# Altium PCB main.PcbDoc
Units mm, origin at the board's own origin, x right, y up, seen from the top; angles counter-clockwise.
Board outline 55.36 x 48.37 mm, 2 copper layers (Top Layer, Bottom Layer); 17 components, 15 nets, 86 pads, 15 vias.
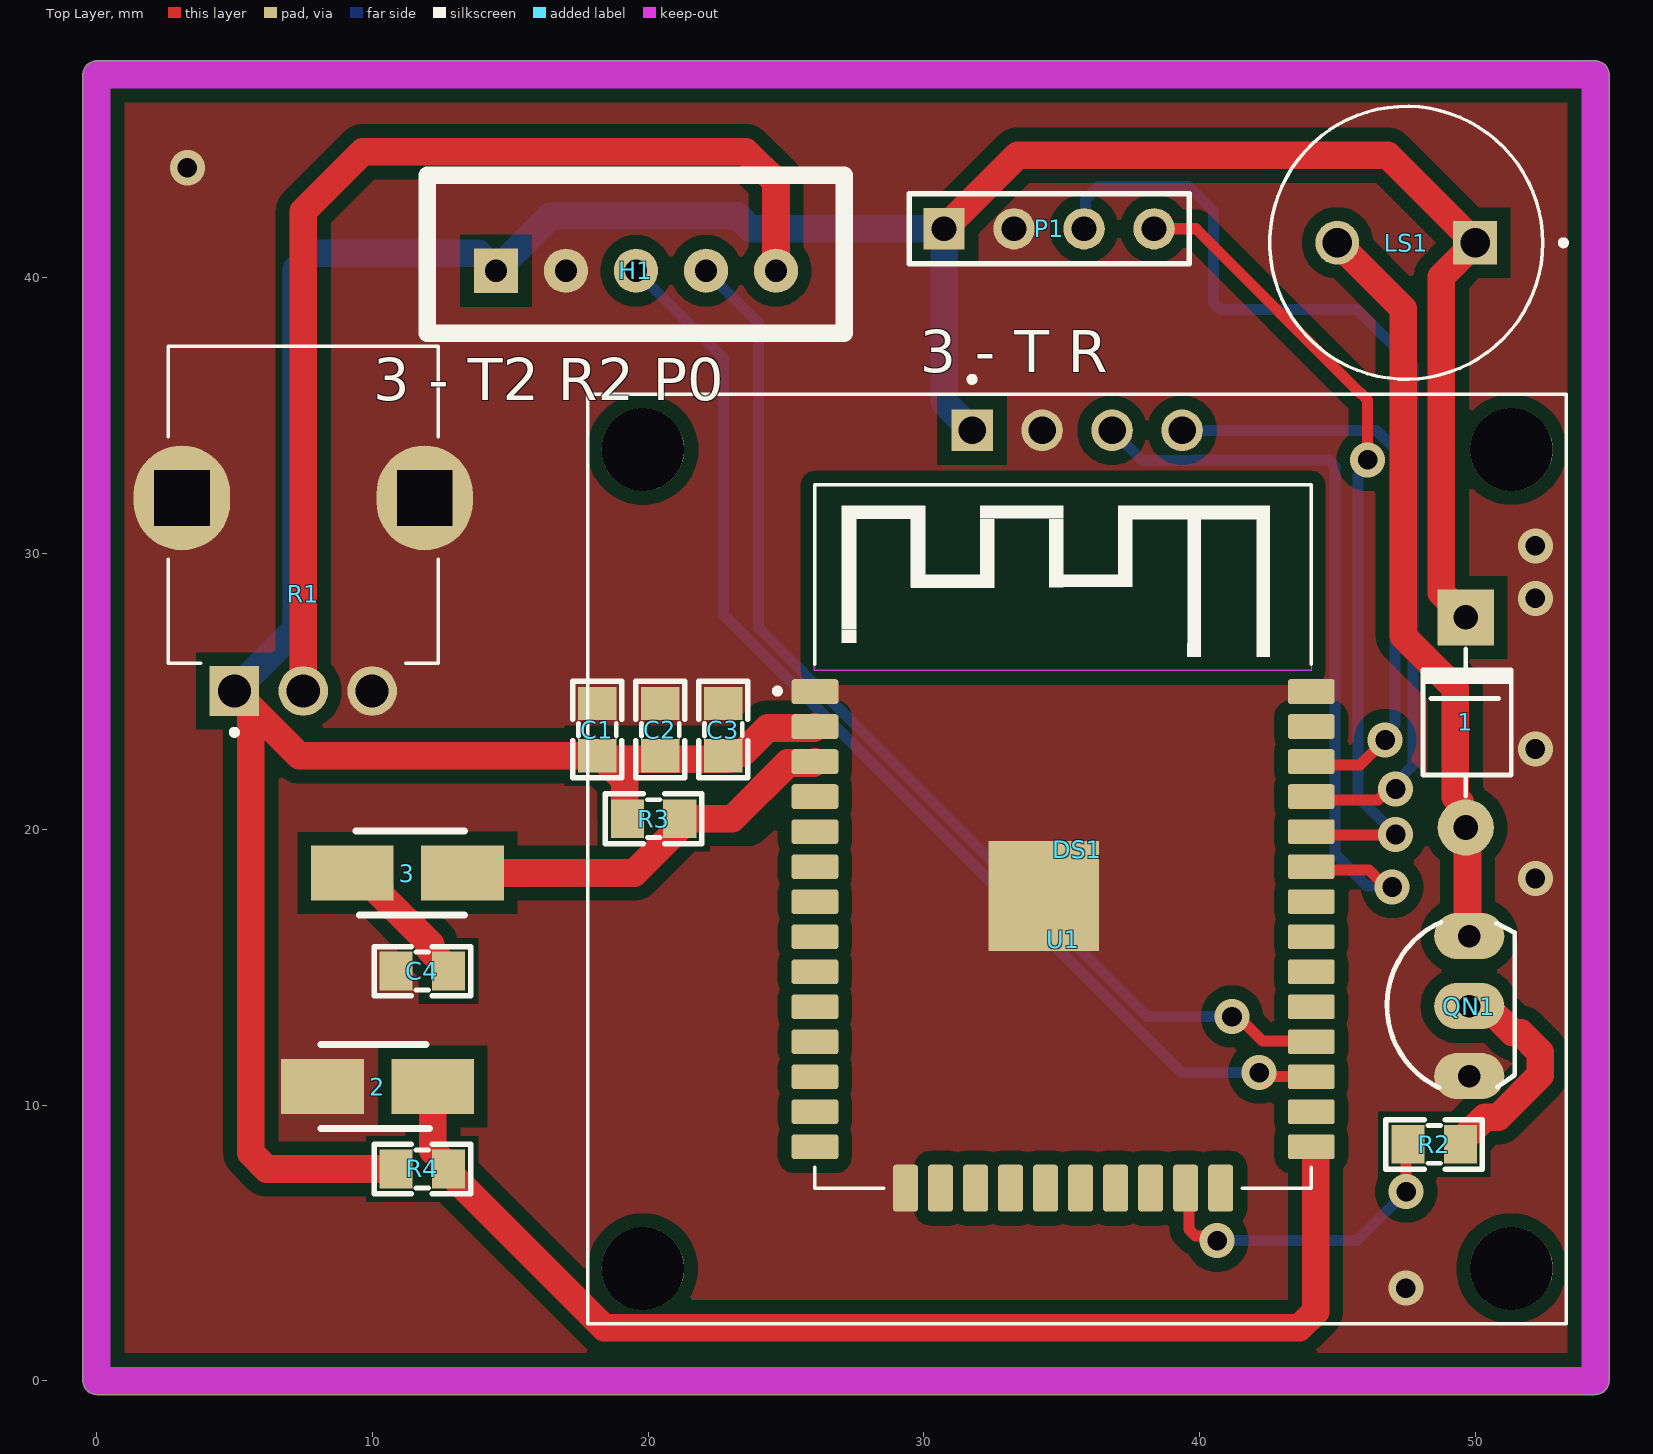
[diagram p0: Top Layer view]
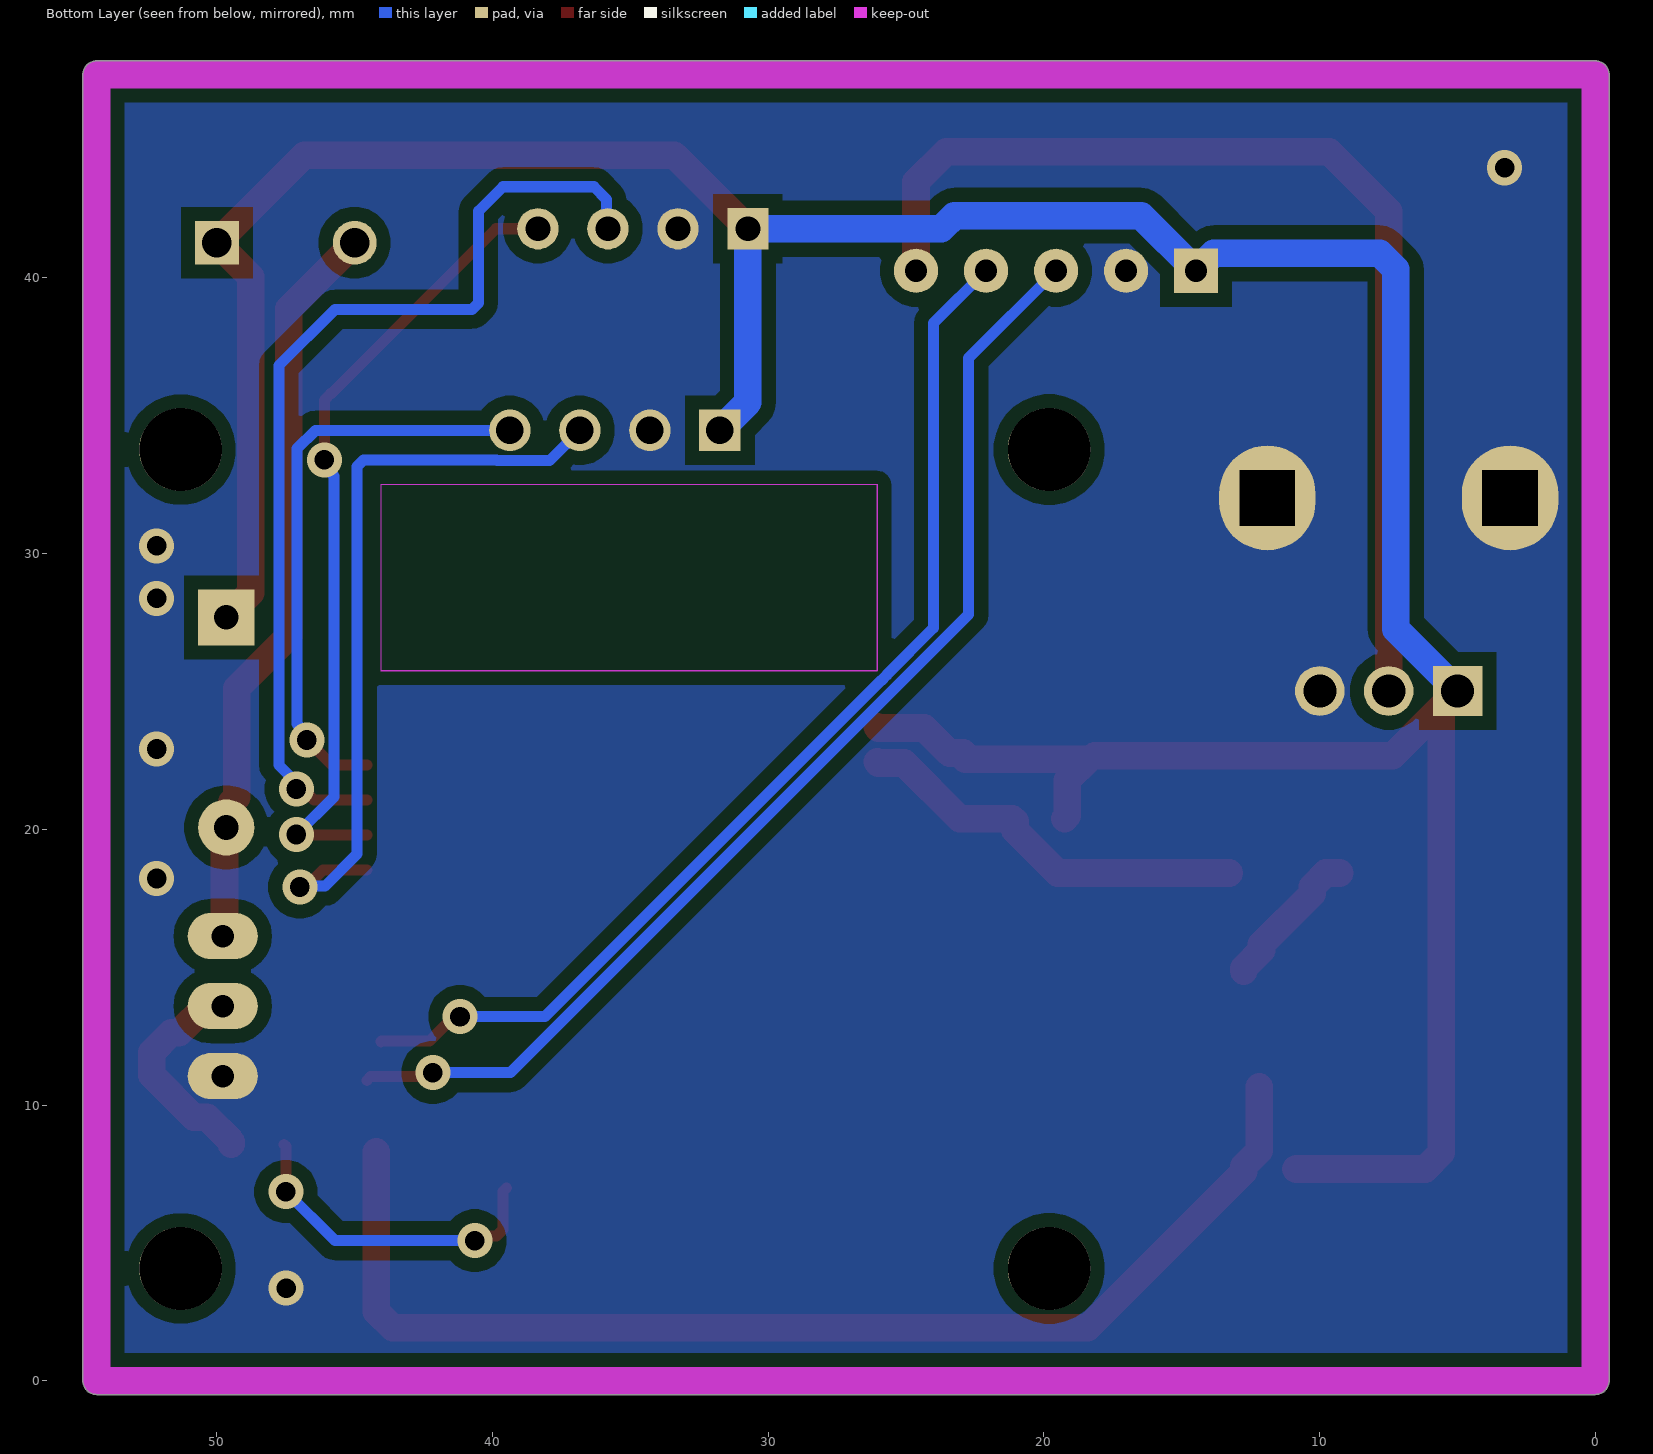
[diagram p1: Bottom Layer view, seen from below]
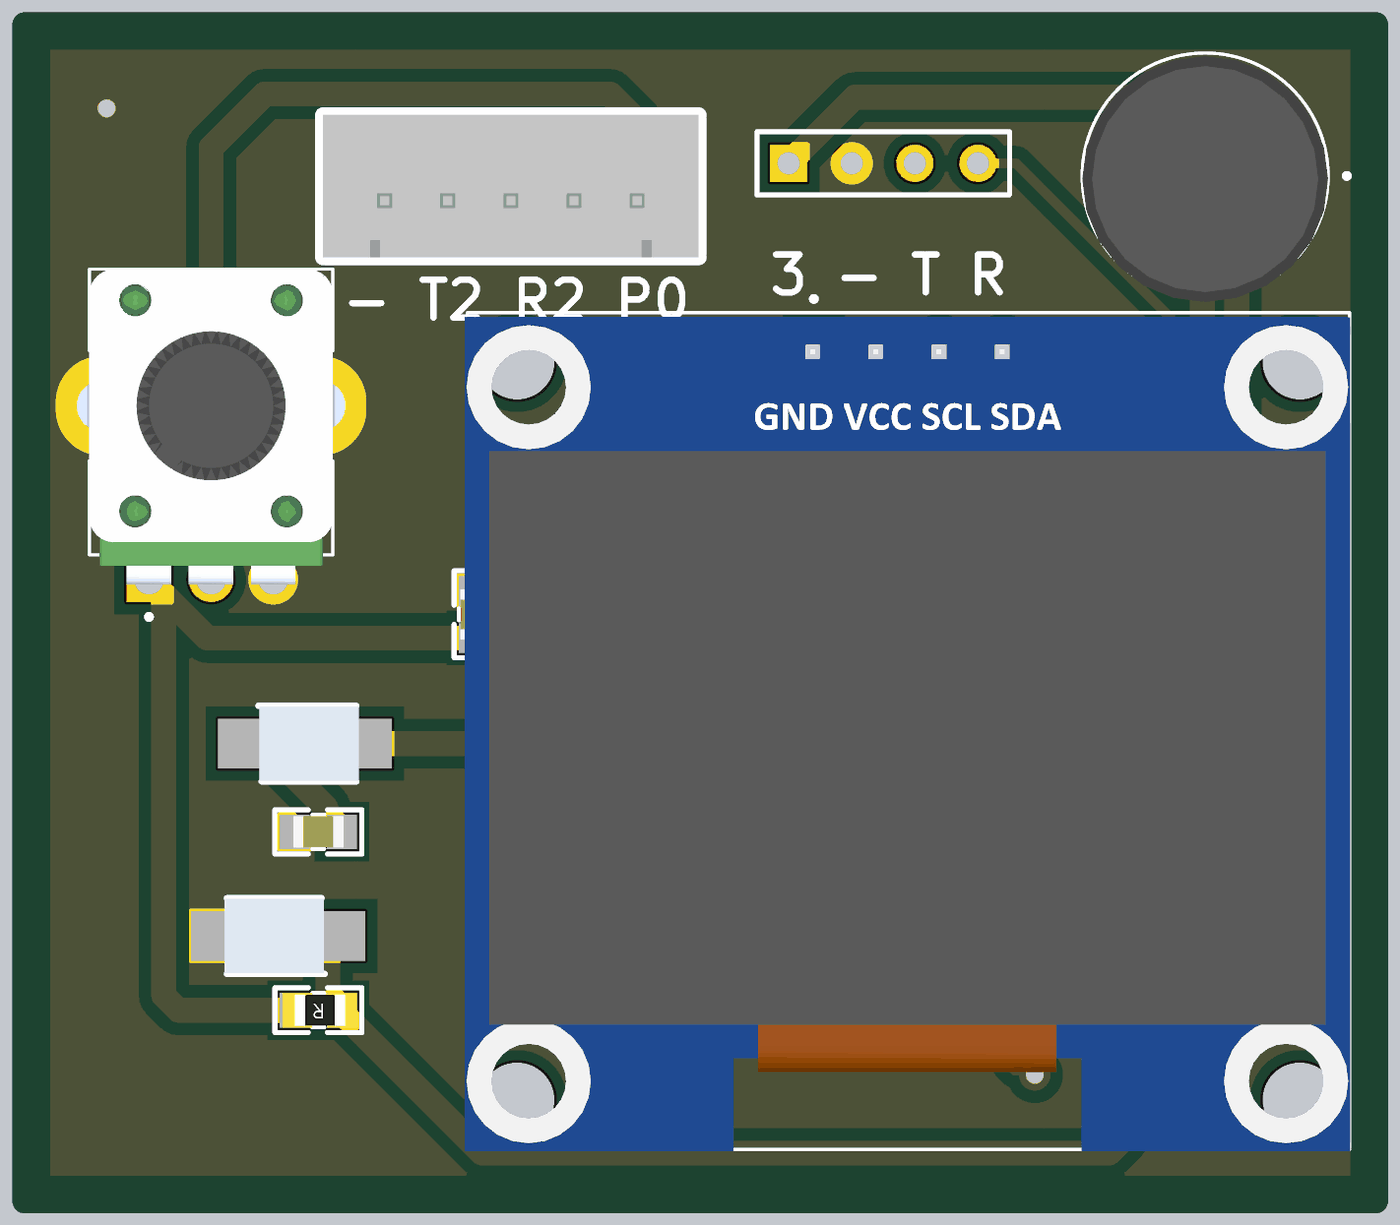
[diagram p2: 3D render of the assembled board from above, using the file's embedded part models]

## Layer stack, top to bottom
Top Solder: solder mask 0.0102, Solder Resist, Dk 3.5
Top Layer: signal copper 0.0356
Dielectric 1: dielectric 0.32, FR-4, Dk 4.8
Bottom Layer: signal copper 0.0356
Bottom Solder: solder mask 0.0102, Solder Resist, Dk 3.5

## Board outline
-0.5,0 ccw(c0,0) 0,-0.5 54.356,-0.5 ccw(c54.356,0) 54.856,0 54.856,47.371 ccw(c54.356,47.371) 54.356,47.871 0,47.871 ccw(c0,47.371) -0.5,47.371

## Design rules (kind name [scope] priority, off if disabled: settings)
Clearance [All] p1: gap=0.15 ignorepadtopadclearanceinfootprint=FALSE
PolygonConnect [All] p1: connectstyle=Direct reliefconductorwidth=0.254 reliefentries=4 polygonreliefangle="90 Angle" airgapwidth=0.254
RoutingVias [All] p1: holewidth=0.711 width=1.27 viastyle="Through Hole" minholewidth=0.711 minwidth=1.27 maxholewidth=0.711 maxwidth=1.27
SolderMaskExpansion [All] p1: expansion=0.102 istentingtop=FALSE
Width [All] p1: maxlimit=3 minlimit=0.15 preferedwidth=1 bottomlayer_prefwidth=0.254 minimp=50.000000 maximp=50.000000 favimp=50.000000
30 further rules are at their usual default settings.

## Components (designator, comment, footprint, x,y, rotation, side; value= is the part's Value field where it differs from the comment)
1 "100v" "DIODE 1A" 49.657,18.796 r270 top
2 "switch2" SWITCH 12.192,10.668 r180 top
3 "switch2" SWITCH 9.271,18.415 r0 top
C1 "22U" "tu 0805" 18.161,23.622 r270 top
C2 "104" "tu 0805" 20.447,23.622 r270 top
C3 "104" "tu 0805" 22.733,23.622 r270 top
C4 "104" "tu 0805" 11.811,14.859 r180 top
DS1 "OLED_128X64_1.3_I2C" "LCD_OLED_128X64_1.3_I2C - DUPLICATE" 35.56,18.923 r0 top
H1 "Header 5P 2.54 Duc Thang" XH2.54M-5 14.478,40.259 r0 top
LS1 "MA300D1-1" BUZZER 47.625,41.529 r270 top
P1 "TTL" HDR1X4 30.734,41.783 r0 top
QN1 "Trans 2N2222" TO92 49.784,13.589 r90 top value=C9014
R1 "RV09AF-40-20K-A10K" TRIM_RV09AF-40-20K-A10K 7.493,32.019 r0 top
R2 "1k" "tro smd 0805" 48.514,8.636 r0 top
R3 "10k" "tro smd 0805" 20.193,20.447 r0 top
R4 "10k" "tro smd 0805" 11.811,7.62 r180 top
U1 "ESP-WROOM-32" MODULE_ESP-WROOM-32 35.052,16.74 r0 top

## Footprints (in the part's own frame and the unit in brackets; to place one, negate y for a bottom-side part, rotate by r counter-clockwise, add the part's x,y. Pads: shape width x height; smd on the part's side, far side on the other; paste and mask are expansions set on the pad)
BUZZER [mm]
  rect 1.59x1.59 hole 1.06: 1(0.254,2.373)
  round 1.59 hole 1.06: 2(0.254,-2.627)
  silkscreen extent -4.7,-5.07 5.2,5.67, body extent -4.57,-5.08 5.33,4.82, height 7.5
"DIODE 1A" [mil] "Diode 1A"
  round 80 hole 35: 1(-50,0)
  rect 80x80 hole 35: 2(-350,0)
  silkscreen extent -305,-61 -95,65, body extent -366,-61 -34,65, height 122
HDR1X4 [mm] "Connector; Header; 4 Position"
  rect 1.5x1.5 hole 0.9: 1(0,0)
  round 1.5 hole 0.9: 2(2.54,0) 3(5.08,0) 4(7.62,0)
  silkscreen extent -1.27,-1.27 8.89,1.27
"LCD_OLED_128X64_1.3_I2C - DUPLICATE" [mm]
  rect 1.508x1.508 / inner round 1.508 / far side rect 1.508x1.508 hole 1: 1(-3.81,15.55)
  round 1.508 hole 1: 2(-1.27,15.55) 3(1.27,15.55) 4(3.81,15.55)
  round 3 hole 3 unplated: ""(-15.75,-14.85) ""(-15.75,14.85) ""(15.75,-14.85) ""(15.75,14.85)
  silkscreen extent -17.75,-16.85 17.75,17.5, body extent -17.87,-16.93 17.78,16.67, height 10.8
MODULE_ESP-WROOM-32 [mm]
  rrect22% 1.7x0.9 smd: 1(-9,8.255) 2(-9,6.985) 3(-9,5.715) 4(-9,4.445) 5(-9,3.175) 6(-9,1.905) 7(-9,0.635) 8(-9,-0.635) 9(-9,-1.905) 10(-9,-3.175) 11(-9,-4.445) 12(-9,-5.715) 13(-9,-6.985) 14(-9,-8.255) 25(9,-8.255) 26(9,-6.985) 27(9,-5.715) 28(9,-4.445) 29(9,-3.175) 30(9,-1.905) 31(9,-0.635) 32(9,0.635) 33(9,1.905) 34(9,3.175) 35(9,4.445) 36(9,5.715) 37(9,6.985) 38(9,8.255)
  rect 4x4 smd: 1.1(-0.7,0.845)
  rrect22% 0.9x1.7 smd: 15(-5.715,-9.755) 16(-4.445,-9.755) 17(-3.175,-9.755) 18(-1.905,-9.755) 19(-0.635,-9.755) 20(0.635,-9.755) 21(1.905,-9.755) 22(3.175,-9.755) 23(4.445,-9.755) 24(5.715,-9.755)
  Keep-Out Layer region: 9,9.026 -9.026,9.026 -9.026,15.75 9,15.75
  Keep-Out Layer region: 9,9.012 -9.012,9.012 -9.012,15.75 9,15.75
  silkscreen extent -10.46,-9.75 9,15.75, body extent -8.98,-9.78 9.02,15.72, height 3.25
SWITCH [mm]
  rect 3x2 smd: 1(0,0) 2(4,0)
  silkscreen extent 0.13,-1.52 4.06,1.52, body extent 0.16,-1.5 4.16,1.5, height 2.5
TO92 [mil] "TO-92"
  oval 66x100 hole 32: 1(-100,0) 2(0,0) 3(100,0)
  silkscreen extent -117,-65 120,118, body extent -109,-66 109,95, height 245
TRIM_RV09AF-40-20K-A10K [mm]
  rect 1.8x1.8 / inner round 1.8 / far side rect 1.8x1.8 hole 1.2: 1(-2.5,-7)
  round 1.8 hole 1.2: 2(0,-7) 3(2.5,-7)
  oval 3.5x3.8 hole 2 square: SH1(-4.4,0) SH2(4.4,0)
  silkscreen extent -4.9,-8.6 4.9,5.5, body extent -5.7,-7.2 5.7,5.5, height 20
"tro smd 0805" [mm]
  rect 1.2x1.4 smd: 1(-0.946,-0.061) 2(0.954,-0.061)
  silkscreen extent -1.75,-0.97 1.75,0.84, body extent -1.56,-0.76 1.44,0.64, height 0.53
"tu 0805" [mm] "Compoment SMD 80x50mil"
  rect 1.2x1.4 smd: 1(-0.946,-0.003) 2(0.954,-0.003)
  silkscreen extent -1.75,-0.89 1.75,0.89, body extent -1.01,-0.64 1.01,0.63, height 0.61
XH2.54M-5 [mm]
  rect 1.6x1.6 hole 0.8: 1(0,0)
  round 1.6 hole 0.8: 2(2.54,0) 3(5.08,0) 4(7.62,0) 5(10.16,0)
  silkscreen extent -2.48,-2.26 12.64,3.46, body extent -2.48,-2.26 12.64,3.48, height 6.91

## Part data
1: library part "Diode 1N4007", "Cắm", Chung_Loai=Cắm, Don_Vi=Con, Ma_Hang=MH001063, Ten_Linh_Kien="Diode 1N4007 1A (DIP)"
C1: library part "Tu 0805 225 25V 10%", "Dán", Chung_Loai=Dán, Don_Vi=Con, Ma_Hang=MH007483, So_Chan=2, Ten_Linh_Kien="Tụ 0805 225-2.2uF 25V 10%"
C2 C3 C4: library part "Tu 0805 104 50V 10%", "Dán", Chung_Loai=Dán, Don_Vi=Con, Ma_Hang=MH004551, So_Chan=2, Ten_Linh_Kien="Tụ 0805 104-100nF 10% 50V"
DS1: "Non-Touch Graphic LCD Display Module Transmissive White OLED, Monochrome I2C 1.3 (33.02mm) 128 x 64", Package=None, Check_prices=https://www.snapeda.com/parts/OLED%20128x64%201.3%22%20I2C/UNIVERSAL-SOLDER+Electronics+Ltd/view-part/?ref=eda, MF="UNIVERSAL-SOLDER Electronics Ltd", MP="OLED 128x64 1.3&quot; I2C", SnapEDA_Link=https://www.snapeda.com/parts/OLED%20128x64%201.3%22%20I2C/UNIVERSAL-SOLDER+Electronics+Ltd/view-part/?ref=snap
H1: "Cắm", Chung_Loai=Cắm, Don_Vi=Con, Ma_Hang=MH001298, Ten_Linh_Kien="Header 5P XH2.54-5P Đực Thẳng"
LS1: "Piezo Buzzers & Audio Indicators 1300pF 300kHz Ultrasonic Sensor", Package=None, Availability=Unavailable, MP=MA300D1-1, Price=None
P1: library part "Header 4", "Header, 4-Pin", LatestRevisionDate=17-Jul-2002, LatestRevisionNote="Re-released for DXP Platform.", Publisher="Altium Limited"
QN1: library part "Trans 2N3904", "NPN transistor EBC"
R1: "PC Mount Black Shaft Potentiometers Audio 9mm 10K", Package=None, Check_prices=https://www.snapeda.com/parts/RV09AF-40-20K-A10K/Alpha/view-part/?ref=eda, MF="Alpha Taiwan", MP=RV09AF-40-20K-A10K, SnapEDA_Link=https://www.snapeda.com/parts/RV09AF-40-20K-A10K/Alpha/view-part/?ref=snap
R2: library part "Tro 0805 1% 1k", "Dán", Chung_Loai=Dán, Don_Vi=Con, Ma_Hang=MH005468, So_Chan=2, Ten_Linh_Kien="Trở 0805 1% 1k"
R3 R4: library part "Tro 0805 1% 0.33R", "Dán", Chung_Loai=Dán, Don_Vi=Con, Ma_Hang=MH005467, So_Chan=2, Ten_Linh_Kien="Trở 0805 1% 0.33R"
U1: "Transceptor serie ESP-WROOM-32; Placa de evaluaciÃ³n 802.11 b/g/n (Wi-Fi, WiFi, WLAN), BluetoothÂ® Smart 4.x de bajo consumo (BLE)", Package="Module Espressif Systems", Check_prices=https://www.snapeda.com/parts/ESP-WROOM-32/Espressif+Systems/view-part/?ref=eda, MF="Espressif Systems", MP=ESP-WROOM-32, SnapEDA_Link=https://www.snapeda.com/parts/ESP-WROOM-32/Espressif+Systems/view-part/?ref=snap

## Via types
v1: diameter 1.27, hole 0.711, Top Layer to Bottom Layer, 15 vias

## Nets (pads, with @x,y where several pads share a name; then routed paths per layer and width w, separated by ;. In a path a pad name is that pad's centre, name@x,y a point inside that pad or via, vN(x,y) a via of type N, cw(c..) or ccw(c..) an arc to the next point about the centre after c; other vN are vias at no path point)
G15: R2.1 U1.23 | length 12.1
  Top Layer w0.4: U1.23 39.624,6.858 39.624,5.479 39.858,5.245 40.475,5.245 v1(40.64,5.08) ; v1(47.498,6.858) 47.498,8.505 R2.1
  Bottom Layer w0.4: v1(40.64,5.08) 45.72,5.08 v1(47.498,6.858)
GND2: 2.2 C1.1 C2.1 C3.1 C4.2 DS1.2 H1.2 P1.2 QN1.1 R1.3 R1.SH1 R1.SH2 U1.1 U1.1.1 U1.15 U1.38
  other v1: 47.485,3.356 52.184,18.215 52.184,22.914 52.184,28.375 52.184,30.28 3.289,43.996
IO0: 2.1 R4.1 U1.25 | length 43.2
  Top Layer w1: 2.1 12.192,8.345 12.757,7.781 R4.1 12.757,7.581 18.414,1.923 43.624,1.923 44.21,2.509 U1.25@44.21,8.308
Net1_1: 1.1 LS1.2 QN1.3 | length 27.1
  Top Layer w1: LS1.2 47.386,38.887 47.386,27.006 49.276,25.116 49.276,21.168 49.46,20.984 49.46,20.263 49.721,20.002 49.721,16.192 QN1.3
Net3_1: 3.1 C4.1 | length 5.3
  Top Layer w1: 3.1 9.771,18.415 10.271,17.915 10.271,17.667 12.107,15.832 12.107,15.612 12.757,14.962 C4.1
Net3_2: 3.2 R3.2 U1.3 | length 14.6
  Top Layer w1: 3.2 19.495,18.415 21.047,19.967 21.047,20.286 R3.2 23.053,20.386 25.072,22.405 26.002,22.405 U1.3
NetQN1_2: QN1.2 R2.2 | length 8.1
  Top Layer w1: R2.2 49.468,8.675 50.354,9.561 50.832,9.561 52.353,11.081 52.353,11.909 51.645,12.617 51.371,12.617 50.399,13.589 QN1.2
PB0MCU2: H1.5 R1.2 | length 39.1
  Top Layer w1: R1.2 7.493,42.418 9.652,44.577 23.544,44.577 24.638,43.483 H1.5
RX: P1.4 U1.34 | length 29.5
  Top Layer w0.4: P1.4 39.878,41.783 45.847,35.814 45.867,35.814 46.101,35.58 v1(46.101,33.401) ; U1.34@44.56,19.788 44.572,19.8 47.105,19.8 v1(47.117,19.812)
  Bottom Layer w0.4: P1.4@38.266,41.695 P1.4 ; v1(46.101,33.401) 46.101,33.166 45.751,32.816 45.751,21.178 v1(47.117,19.812)
RX2: H1.4 U1.28 | length 40
  Top Layer w0.4: v1(41.179,13.208) 41.402,13.208 42.291,12.319 44.028,12.319 U1.28
  Bottom Layer w0.4: H1.4 23.998,38.359 23.998,27.31 25.69,25.618 25.69,25.607 25.895,25.402 25.906,25.402 38.1,13.208 v1(41.179,13.208)
SCL: DS1.3 U1.33 | length 28
  Top Layer w0.4: U1.33@44.56,18.518 46.144,18.518 46.755,17.907 v1(46.99,17.907)
  Bottom Layer w0.4: DS1.3 37.934,33.369 39.827,33.369 39.859,33.401 44.676,33.401 44.91,33.167 44.91,19.098 46.072,17.936 46.961,17.936 v1(46.99,17.907)
SDA: DS1.4 U1.36 | length 21.3
  Top Layer w0.4: U1.36@44.56,22.328 45.823,22.328 v1(46.736,23.241)
  Bottom Layer w0.4: DS1.4 46.426,34.473 47.086,33.813 47.086,23.826 46.736,23.476 v1(46.736,23.241)
TX: P1.3 U1.35 | length 36.1
  Top Layer w0.4: U1.35@44.56,21.058 46.477,21.058 46.882,21.463 v1(47.117,21.463)
  Bottom Layer w0.4: P1.3 35.861,41.83 35.861,42.846 36.322,43.307 39.624,43.307 40.513,42.418 40.513,39.096 40.747,38.862 45.72,38.862 47.752,36.83 47.752,22.333 47.117,21.698 v1(47.117,21.463)
TX2: H1.3 U1.27 | length 42.6
  Top Layer w0.4: v1(42.164,11.176) 42.303,11.037 44.421,11.037 U1.27@44.56,10.898
  Bottom Layer w0.4: H1.3 22.728,37.089 22.728,27.792 39.343,11.176 v1(42.164,11.176)
VDD2: 1.2 C1.2 C2.2 C3.2 DS1.1 H1.1 LS1.1 P1.1 R1.1 R3.1 R4.2 U1.2 | length 131.7
  Top Layer w1: R1.1 R1.1@5.588,24.424 ; R4.2 6.174,7.681 5.588,8.267 R1.1@5.588,24.424 ; C1.2 7.344,22.668 R1.1@5.588,24.424 ; R3.1 19.147,20.486 19.147,21.778 18.385,22.541 22.857,22.541 22.857,22.695 22.93,22.768 23.422,22.768 23.515,22.86 23.522,22.86 24.337,23.675 26.002,23.675 U1.2 ; P1.1 33.401,44.45 46.823,44.45 LS1.1 48.768,40.045 48.768,28.575 1.2
  Bottom Layer w1: R1.1 7.239,27.265 7.239,40.308 7.825,40.894 13.843,40.894 H1.1 16.478,42.259 23.243,42.259 23.719,41.783 P1.1 30.734,35.489 DS1.1
pads on no net: DS1. U1.4 U1.5 U1.6 U1.7 U1.8 U1.9 U1.10 U1.11 U1.12 U1.13 U1.14 U1.16 U1.17 U1.18 U1.19 U1.20 U1.21 U1.22 U1.24 U1.26 U1.29 U1.30 U1.31 U1.32 U1.37

## Polygon pours and split planes (outlines as drawn)
GND2 on Bottom Layer "GND2_L02_P001" (solid, remove dead copper, pour order 1): 54.483,0 54.483,47.371 -0.127,47.371 -0.127,0
GND2 on Top Layer "GND2_L01_P000" (solid, remove dead copper, pour order 0): 0,0 54.356,0 54.356,47.371 54.483,47.498 0,47.498

## Keep-outs
Keep-Out Layer:
  lines w1: 0,0 0,47.371 54.356,47.371 54.356,0 0,0

## Silkscreen, mask and mechanical layers (free items; w line width, h text height)
Top Overlay:
  text "3 - T R" at 29.845,36.576 h1.52
  text "3 - T2 R2 P0" at 10.033,35.56 h1.52